# Altium PCB PCB1.PcbDoc
Units mm, origin at the board's own origin, x right, y up, seen from the top; angles counter-clockwise.
Board outline 115.7 x 56.26 mm, 2 copper layers (Top Layer, Bottom Layer); 82 components, 59 nets, 220 pads, 73 vias.
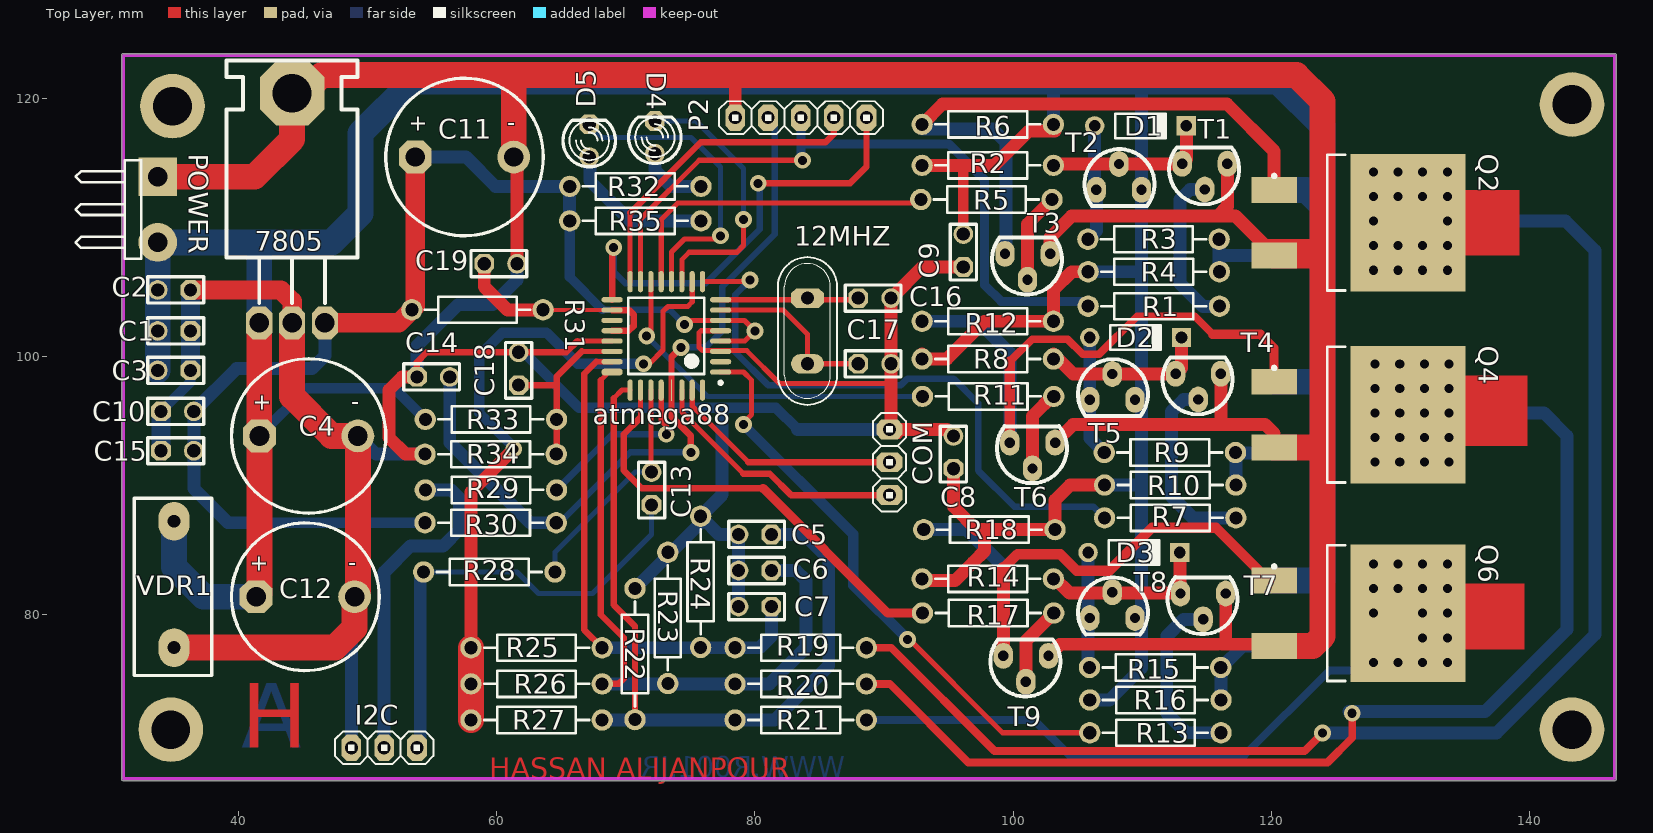
[diagram p0: Top Layer view]
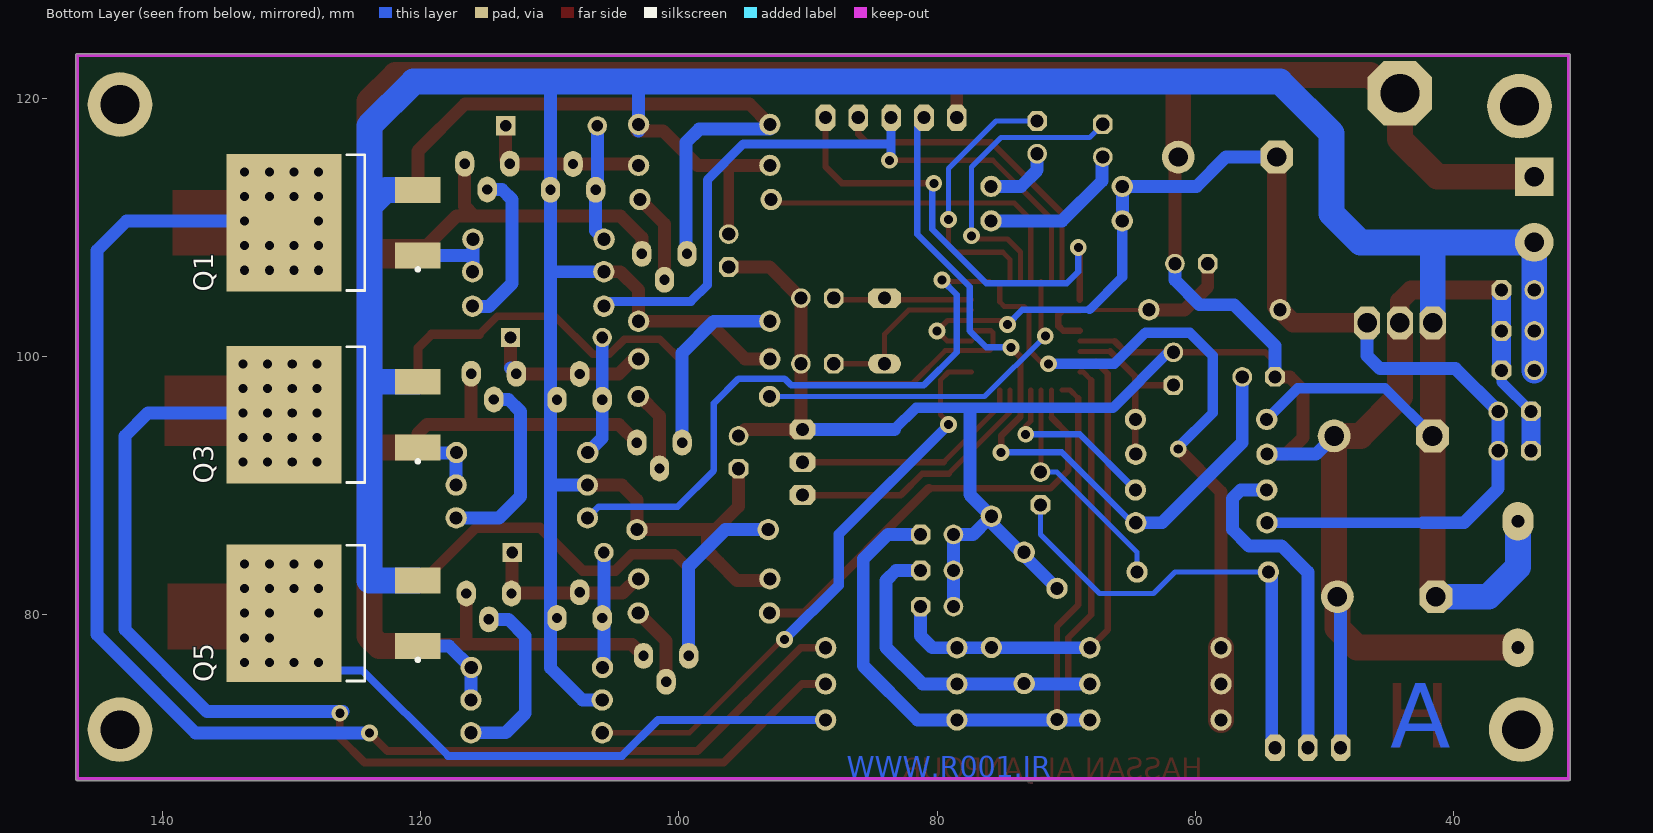
[diagram p1: Bottom Layer view, seen from below]

## Layer stack, top to bottom
Top Layer: signal copper 0.0356
Dielectric: dielectric 0.32, FR-4, Dk 4.8
Bottom Layer: signal copper 0.0356

## Board outline
31.115,67.183 cw(c31.115,67.31) 30.988,67.31 30.988,123.317 cw(c31.115,123.317) 31.115,123.444 146.558,123.444 cw(c146.558,123.317) 146.685,123.317 146.685,67.31 cw(c146.558,67.31) 146.558,67.183

## Design rules (kind name [scope] priority, off if disabled: settings)
Clearance [All] p1: gap=0.254
PolygonConnect [All] p1: connectstyle=Relief reliefconductorwidth=0.254 reliefentries=4 polygonreliefangle="90 Angle" airgapwidth=0.254
RoutingVias [All] p1: holewidth=0.711 width=1.27 viastyle="Through Hole" minholewidth=0.711 minwidth=1.27 maxholewidth=0.711 maxwidth=1.27
SilkscreenOverComponentPads [All] p1: minsilkscreentomaskgap=0.254
SolderMaskExpansion [All] p1: expansion=0.102
Width [All] p1: maxlimit=2 minlimit=0.3 preferedwidth=1
27 further rules are at their usual default settings.

## Components (designator, comment, footprint, x,y, rotation, side; value= is the part's Value field where it differs from the comment)
12MHZ "CRYSTAL" My_Crystal 84.074,101.981 r270 top (schematic designator Y?)
7805 "7805" My_TO-220 41.656,102.616 r0 top (schematic designator U2)
atmega88 "ATmega88A-AU" 32A_N 73.152,101.6 r180 top (schematic designator U1)
C1 "Cap" My_cap100n 35.052,101.981 r180 top
C2 "Cap" My_cap100n 35.052,105.156 r180 top
C3 "Cap" My_cap100n 35.052,98.933 r180 top
C4 "Cap" My_cap3300u#1 49.276,93.853 r0 top
C5 "Cap" My_cap100n 80.01,86.233 r180 top
C6 "Cap" My_cap100n 80.01,83.439 r180 top
C7 "Cap" My_cap100n 80.01,80.645 r180 top
C8 "Cap" My_cap100n 95.377,92.583 r90 top
C9 "Cap" My_cap100n 96.139,108.204 r90 top
C10 "Cap" My_cap100n 35.306,95.758 r0 top
C11 "Cap" My_cap3300u#2 61.341,115.443 r0 top
C12 "Cap" My_cap3300u#1 49.022,81.407 r0 top
C13 "Cap" My_cap100n 72.009,89.789 r90 top
C14 "Cap" My_cap100n 55.118,98.425 r0 top
C15 "Cap" My_cap100n 35.306,92.71 r0 top
C16 "Cap" My_cap100n 89.281,104.521 r0 top
C17 "Cap" My_cap100n 89.281,99.441 r0 top
C18 "Cap" My_cap100n 61.722,99.06 r90 top
C19 "Cap" My_cap100n 60.325,107.188 r0 top
COM "Header 3" My_1X03 90.424,91.821 r90 top (schematic designator P3)
D1 "1N4148" DO-35 109.855,117.856 r0 top
D2 "1N4148" DO-35 109.474,101.473 r0 top
D3 "1N4148" DO-35 109.347,84.836 r0 top
D4 "LED" My_LED3MM 72.263,116.967 r90 top
D5 "LED" My_LED3MM 67.183,116.713 r90 top
I2C "Header 3" My_1X03 51.308,69.723 r180 top (schematic designator P1)
P2 "Header 5" My_1X05 83.566,118.491 r180 top
POWER "Comment" HDR1X3H 33.782,113.919 r270 top
Q1 "IRF4905S" D2PAK_N 127,110.363 r0 bottom
Q2 "IRFZ44NS" D2PAK_N 127,110.363 r0 top
Q3 "IRF4905S" D2PAK_N 127,95.504 r0 bottom
Q4 "IRFZ44NS" D2PAK_N 127,95.504 r0 top
Q5 "IRF4905S" D2PAK_N 127,80.137 r0 bottom
Q6 "IRFZ44NS" D2PAK_N 127,80.137 r0 top
R1 "1k" My_axial-0.4 110.871,103.886 r180 top
R2 "1k" My_axial-0.4 98.044,114.808 r0 top
R3 "1k" My_axial-0.4 110.871,109.093 r0 top
R4 "1k" My_axial-0.4 110.871,106.553 r180 top
R5 "1k" My_axial-0.4 97.917,112.141 r180 top
R6 "1k" My_axial-0.4 98.044,117.983 r0 top
R7 "1k" My_axial-0.4 112.141,87.503 r180 top
R8 "1k" My_axial-0.4 98.044,99.822 r0 top
R9 "1k" My_axial-0.4 112.141,92.583 r0 top
R10 "1k" My_axial-0.4 112.141,90.043 r180 top
R11 "1k" My_axial-0.4 98.044,96.901 r180 top
R12 "1k" My_axial-0.4 98.044,102.743 r0 top
R13 "1k" My_axial-0.4 110.998,70.866 r180 top
R14 "1k" My_axial-0.4 98.044,82.804 r0 top
R15 "1k" My_axial-0.4 110.998,75.946 r0 top
R16 "1k" My_axial-0.4 110.998,73.406 r180 top
R17 "1k" My_axial-0.4 98.044,80.137 r180 top
R18 "1k" My_axial-0.4 98.171,86.614 r0 top
R19 "1k" My_axial-0.4 83.566,77.47 r0 top
R20 "1k" My_axial-0.4 83.566,74.676 r0 top
R21 "1k" My_axial-0.4 83.566,71.882 r0 top
R22 "1k" My_axial-0.4 70.739,76.962 r270 top
R23 "1k" My_axial-0.4 73.279,79.756 r270 top
R24 "1k" My_axial-0.4 75.819,82.55 r270 top
R25 "1k" My_axial-0.4 63.119,77.47 r0 top
R26 "1k" My_axial-0.4 63.119,74.676 r0 top
R27 "1k" My_axial-0.4 63.119,71.882 r0 top
R28 "1k" My_axial-0.4 59.436,83.312 r180 top
R29 "1k" My_axial-0.4 59.563,89.662 r180 top
R30 "1k" My_axial-0.4 59.538,87.122 r180 top
R31 "1k" My_axial-0.4 58.547,103.632 r0 top
R32 "1k" My_axial-0.4 70.739,113.157 r180 top
R33 "1k" My_axial-0.4 59.563,95.123 r180 top
R34 "1k" My_axial-0.4 59.563,92.456 r0 top
R35 "1k" My_axial-0.4 70.739,110.49 r180 top
T1 "2N2222" T4-TO92 116.078,114.681 r270 top
T2 "2N2222" T4-TO92 106.934,113.157 r90 top
T3 "2N2222" T4-TO92 102.362,107.696 r270 top
T4 "2N2222" T4-TO92 115.57,98.425 r270 top
T5 "2N2222" T4-TO92 106.426,96.901 r90 top
T6 "2N2222" T4-TO92 102.743,93.091 r270 top
T7 "2N2222" T4-TO92 115.951,81.407 r270 top
T8 "2N2222" T4-TO92 106.426,80.01 r90 top
T9 "2N2222" T4-TO92 102.235,76.581 r270 top
VDR1 "VDR75V" "0.47uf 400v" 37.973,74.676 r90 top

## Footprints (in the part's own frame and the unit in brackets; to place one, negate y for a bottom-side part, rotate by r counter-clockwise, add the part's x,y. Pads: shape width x height; smd on the part's side, far side on the other; paste and mask are expansions set on the pad)
"0.47uf 400v" [mm] "17*6mm"
  oval 3x2.4 hole 1: 1(2.794,2.921) 2(12.573,2.921)
  silkscreen extent 0.63,0 14.35,6
32A_N [mm] "Thin QFP, 32-Leads, Body 7x7mm, Pitch 0.8mm, IPC Medium Density"
  oval 1.65x0.4 smd: 1(-4.2,2.8) 2(-4.2,2) 3(-4.2,1.2) 4(-4.2,0.4) 5(-4.2,-0.4) 6(-4.2,-1.2) 7(-4.2,-2) 8(-4.2,-2.8) 17(4.2,-2.8) 18(4.2,-2) 19(4.2,-1.2) 20(4.2,-0.4) 21(4.2,0.4) 22(4.2,1.2) 23(4.2,2)
  oval 0.4x1.65 smd: 9(-2.8,-4.2) 10(-2,-4.2) 11(-1.2,-4.2) 12(-0.4,-4.2) 13(0.4,-4.2) 14(1.2,-4.2) 15(2,-4.2) 16(2.8,-4.2) 25(2.8,4.2) 26(2,4.2) 27(1.2,4.2) 28(0.4,4.2) 30(-1.2,4.2) 31(-2,4.2) 32(-2.8,4.2)
  oval 1.65x0.55 smd: 24(4.2,2.8)
  oval 0.04x1.65 smd: 29(-0.4,4.2)
  silkscreen extent -4.33,-2.95 2.95,3.75, body extent -3.5,-3.5 3.5,3.5, height 1.2
D2PAK_N [mm] "D2-PAK, 4-Leads, Body 8.8x10.4mm, Pitch 2.54mm, Lead Span 15.1mm, IPC Medium Density"
  rect 3.5x2 smd: 1(-6.8,2.54) 3(-6.8,-2.54)
  rect 8.9x10.65 smd: 2(3.55,0)
  silkscreen extent -6.92,-5.25 -1.3,5.25, body extent -2.7,-5.28 6.3,5.28, height 4.69
DO-35 [mm] "Diode, Axial; Body 3.8 x 1.9 mm (LxDia. max), Lead Dia. 0.53 mm (max)"
  round 1.5 hole 0.9: 1(-3.55,0)
  rect 1.5x1.5 hole 0.9: 2(3.55,0)
  silkscreen extent -1.95,-0.95 2.05,0.95
HDR1X3H [mm] "Connector; Header; 3 Position; Right Angle"
  rect 3x3 hole 1.5: 1(0,0)
  round 3 hole 1.5: 3(5.08,0)
  silkscreen extent -1.27,-6.35 6.35,-1.27
My_1X03 [mil]
  oct 60x80 hole 40: 1(-100,0) 2(0,0) 3(100,0)
  silkscreen extent -150,-50 150,50
My_1X05 [mil]
  oct 60x80 hole 40: 1(-200,0) 2(-100,0) 3(0,0) 4(100,0) 5(200,0)
  silkscreen extent -250,-50 250,50
My_axial-0.4 [mil]
  round 65 hole 40: 1(-200.5,-0.5) 2(199.5,-0.5)
  silkscreen extent -160,-41 160,40
My_cap100n [mil]
  oct 60x60 hole 40: 1(-50,0)
  round 60 hole 40: 2(50,0)
  silkscreen extent -90,-40 80,40
My_cap3300u#1 [mil]
  oct 100x100 hole 60: +(-300,0)
  round 100 hole 60: -(0,0)
  silkscreen extent -385,-235 85,235
My_cap3300u#2 [mil]
  oct 100x100 hole 59.06: +(-300,0)
  round 100 hole 59.06: -(0,0)
  silkscreen extent -390,-240 90,240
My_Crystal [mil]
  oct 60x100 hole 40: 1(-100,0)
  oval 60x100 hole 40: 2(100,0)
  silkscreen extent -225,-90 225,90
My_LED3MM [mil]
  round 60 hole 40: A(-50,0)
  oct 60x60 hole 40: K(50,0)
  silkscreen extent -80,-80 62,80
My_TO-220 [mil]
  oct 196.85x196.85 hole 118.11: 0(99.49,699.49)
  oct 80x100 hole 59.06: 1(-0.5,-0.5) 2(99.5,-0.5) 3(199.5,-0.5)
  silkscreen extent -100,60 300,800
T4-TO92 [mm]
  oval 2x1.5 hole 0.8: B(1.75,-1.25) C(-0.25,-3) E(-0.25,0.5)
  silkscreen extent -1.52,-4 2.89,1.41

## Part data
12MHZ: "Crystal"
7805: "Regulator"
atmega88: "8-bit AVR Microcontroller, 8KB Flash, 512 Bytes EEPROM, 1KB SRAM, 32-pin TQFP, Industrial Grade (-40°C to 85°C)"
C1 C2 C3 C5 C6 C7 C8 C9 C10 C13 C14 C15 C16 C17 C18 C19: library part "Cap ceramic", "CAP-100Nf"
C4 C11 C12: library part "Cap Pol", "CAP-3300Uf"
COM I2C: "Header, 3-Pin"
D1 D2 D3: library part "Diode 1N4148", "High Conductance Fast Diode"
D4 D5: "Typical INFRARED GaAs LED"
P2: "Header, 5-Pin"
Q1 Q2 Q3 Q4 Q5 Q6: "HEXFET Power MOSFET"
R1 R2 R3 R4 R5 R6 R7 R8 R9 R10 R11 R12 R13 R14 R15 R16 R17 R18 R19 R20 R21 R22 R23 R24 R25 R26 R27 R28 R29 R30 R31 R32 R33 R34 R35: library part Res, "resistor 1/4 wat"
T1 T2 T3 T4 T5 T6 T7 T8 T9: "NPN"
VDR1: library part "0.47uf 400v", "Capacitor 17*6mm"

## Free pads (board coordinates)
  round 5 hole 3: 0(34.798,71.12) 0(34.925,119.38) 0(143.256,71.12) 0(143.256,119.507)

## Via types
v1: diameter 1.3, hole 0.7, Top Layer to Bottom Layer, 73 vias

## Nets (pads, with @x,y where several pads share a name; then routed paths per layer and width w, separated by ;. In a path a pad name is that pad's centre, name@x,y a point inside that pad or via, vN(x,y) a via of type N, cw(c..) or ccw(c..) an arc to the next point about the centre after c; other vN are vias at no path point)
+12V: 7805.1 C1.2 C2.2 C3.2 C4.+ C8.1 C9.2 C12.+ POWER.3 Q1.3 Q3.3 Q5.3 R2.1 R4.2 R6.2 R8.1 R10.2 R12.2 R14.1 R16.2 R18.2 R33.2 T2.C T5.C T8.C VDR1.2 | length 329.3
  Top Layer w0.8: C9.2 96.139,114.668
  Top Layer w1: R8.1@92.951,100.19 93.32,99.822 94.869,99.822 97.777,102.73 R12.2 103.111,105.143 104.534,106.566 R4.2 ; R2.1 98.539,114.795 101.219,117.475 R6.2@103.251,117.475 ; R14.1@93.078,82.664 95.504,82.664 96.888,84.061 97.79,84.963 97.79,86.474 ; C8.1 95.377,88.392 97.168,86.601 R18.2 103.238,88.887 104.407,90.056 R10.2
  Top Layer w2: C4.+@41.643,94.729 7805.1 ; C12.+@41.656,81.661 C4.+
  Bottom Layer w0.8: C4.+ 45.339,97.536 52.095,97.536 R33.2
  Bottom Layer w1: R6.2@103.111,117.462 103.111,121.018 ; R4.2 109.82,106.566 ; R16.2 107.455,73.419 109.934,75.898 109.934,90.274 ; R10.2 109.715,90.056 109.934,90.274 ; 109.934,121.237 T2.C 109.934,90.274
  Bottom Layer w2: C3.2 C1.2 C2.2 POWER.3 47.244,108.839 49.466,111.061 49.466,117.284 53.467,121.285 120.523,121.285 123.952,117.856 123.952,111.633 ; VDR1.2 35.052,83.693 37.338,81.407 C12.+ ; 7805.1 41.643,108.458 ; Q5.3 123.825,82.677 ; Q3.3 123.952,98.044 ; Q1.3 122.682,112.903 123.952,111.633 ; 123.952,82.677 123.952,98.044 ; 123.952,98.044 123.952,111.633
B_EMF_U: atmega88.23 C7.1 R19.1 R24.2 R25.2 | length 40.1
  Top Layer w0.4: 67.723,99.6 atmega88.23
  Top Layer w0.5: 67.723,99.6 66.802,98.679 66.802,78.842 R25.2
  Bottom Layer w1: R25.2 R19.1 80.378,77.457 81.28,78.359 C7.1
B_EMF_V: atmega88.24 C6.1 R20.1 R23.2 R26.2 | length 51.9
  Top Layer w0.4: 68.072,98.171 68.701,98.8 atmega88.24
  Top Layer w0.5: 68.072,98.171 68.072,80.01 69.85,78.232 69.85,75.057 69.456,74.663 R26.2
  Bottom Layer w1: R26.2 R20.1 81.14,74.663 83.947,77.47 83.947,82.677 83.185,83.439 C6.1
B_EMF_W: atmega88.25 C5.1 R21.1 R22.2 R27.2 | length 59.9
  Top Layer w0.4: 69.088,96.774 69.714,97.4 atmega88.25
  Top Layer w0.5: 69.088,96.774 69.088,80.772 70.726,79.134 R22.2
  Bottom Layer w1: R27.2 R21.1 81.521,71.869 85.725,76.073 85.725,84.328 83.82,86.233 C5.1
DP_A0: atmega88.32
GLED: atmega88.11 D4.K | length 21.3
  Top Layer w0.4: atmega88.11 74.352,107.499 74.93,108.077 75.851,108.077 77.692,108.077 78.613,108.077 79.121,108.585 v1(79.121,110.617)
  Bottom Layer w0.4: D4.K 75.438,118.237 79.121,114.554 v1(79.121,110.617)
GND: 7805.0 7805.2 atmega88.3 atmega88.5 atmega88.21 C1.1 C2.1 C3.1 C4.- C5.2 C6.2 C7.2 C8.2 C9.1 C10.1 C11.- C12.- C14.1 C15.1 C16.2 C17.2 C18.2 C19.2 COM.3 I2C.3 P2.5 POWER.1 Q2.3 Q4.3 Q6.3 R22.1 R23.1 R24.1 R34.1 T1.E T3.E T4.E T6.E T7.E T9.E VDR1.1 | length 457.6
  Top Layer w0.4: 66.275,101.2 atmega88.21 ; atmega88.5 75.838,102 75.692,101.854 75.692,100.711 75.946,100.457 79.375,100.457 81.915,97.917 90.551,97.917
  Top Layer w0.5: C14.1 53.848,99.568 54.61,100.33 C18.2 65.405,100.33 66.275,101.2 ; COM.3@90.551,94.488 90.678,94.361 COM.3@91.186,93.853
  Top Layer w1: C14.1 52.705,98.425 51.689,97.409 51.689,93.726 52.972,92.443 R34.1 ; C11.- 61.595,115.189 C19.2 ; P2.5 78.486,120.904 ; COM.3 90.678,94.361 94.869,94.361 C8.2 ; COM.3@90.551,94.488 90.551,97.917 C17.2 C16.2 92.964,106.934 C9.1 ; T9.E 103.632,77.728 115.828,77.728 ; T3.E 102.862,109.212 104.521,110.871 115.824,110.871 ; T6.E 104.644,94.742 119.507,94.742 120.2,94.049 Q4.3 ; 116.07,95.258 T4.E ; T7.E 116.451,77.97 116.209,77.728 Q6.3@120.069,77.728 ; T1.E 116.578,111.625 115.824,110.871 ; 123.952,108.585 119.507,108.585 117.221,110.871 115.824,110.871
  Top Layer w1.5: C2.1 43.307,105.156 44.183,104.28 7805.2
  Top Layer w2: POWER.1 41.275,113.919 44.183,116.827 7805.0 45.072,120.383 46.482,121.793 61.341,121.793 ; VDR1.1 47.498,77.47 49.022,78.994 C12.- ; 7805.2 44.183,96.914 47.244,93.853 C4.-@48.387,93.853 ; C12.-@49.276,81.661 C4.- ; C11.- 61.341,121.793 ; Q6.3 123.19,77.597 123.952,78.359 123.952,92.964 ; Q4.3 123.952,92.964 ; Q2.3 123.825,107.823 ; 61.341,121.793 121.92,121.793 123.952,119.761 123.952,92.964
  Bottom Layer w0.8: C10.1 36.322,98.044 C3.1 ; C18.2 62.103,100.33 66.386,96.047 81.626,96.047 83.312,94.361
  Bottom Layer w1: I2C.3 C12.-@48.768,81.153 ; C4.- 50.686,92.443 R34.1 ; C14.1 53.848,100.838 57.023,104.013 59.69,104.013 61.595,105.918 C19.2 ; R22.1 R24.1@76.06,87.389 ; 77.47,95.947 77.47,89.306 R24.1 R24.1@76.06,87.389 ; C7.2 C6.2 C5.2 77.216,86.233 R24.1@76.06,87.389 ; 83.312,94.361 COM.3
  Bottom Layer w1.5: C15.1 C10.1 ; C3.1 C1.1 C2.1
"GREEN LED": 
MISO: atmega88.16 P2.2 | length 24.9
  Top Layer w0.4: atmega88.16 70.352,111.119
  Top Layer w0.5: 70.352,111.119 75.819,116.586 85.471,116.586 86.106,117.221 P2.2
MOSI/UH: atmega88.15 P2.3 R1.2 | length 54.8
  Top Layer w0.4: atmega88.15 71.152,110.649 75.692,115.189 v1(83.693,115.189)
  Bottom Layer w0.7: v1@83.566,115.189 P2.3 ; 83.566,116.459 94.996,116.459 97.79,113.665 97.79,105.537 99.06,104.267 105.435,104.267 R1.2
NetC13_1: C13.1 I2C.1 R28.2 | length 36.3
  Bottom Layer w0.4: R28.2 61.582,83.325 63.246,81.661 67.437,81.661 72.009,86.233 C13.1
  Bottom Layer w1: I2C.1 54.102,69.977 54.102,83.058 R28.2
NetC17_1: 12MHZ.2 atmega88.7 C17.1 | length 13.7
  Top Layer w0.4: atmega88.7 82.201,103.6 84.074,101.727 12MHZ.2 C17.1
NetC19_1: atmega88.18 atmega88.20 C19.1 R31.2 | length 16.9
  Top Layer w0.3: R31.2@63.634,103.6 atmega88.18
  Top Layer w0.5: atmega88.20 70.25,102 70.612,102.362 70.612,103.251 70.263,103.6 atmega88.18
  Top Layer w1: C19.1 59.055,105.41 60.846,103.619 R31.2
NetD1_1: D1.1 R3.1 T2.E | length 9.2
  Bottom Layer w1: R3.1 106.434,109.736 T2.E ; T2.E@106.299,112.776 106.299,112.907 D1.1
NetD1_2: D1.2 R2.2 T1.C T2.B | length 12.9
  Top Layer w1: R2.2@103.223,114.907 T2.B 113.054,114.907 T1.C 113.405,115.258 D1.2
NetD2_1: D2.1 R9.1 T5.E | length 9.4
  Bottom Layer w1: T5.E@105.924,96.653 D2.1 ; T5.E 105.926,93.693 R9.1
NetD2_2: D2.2 R8.2 T4.C T5.B | length 13.7
  Top Layer w1: R8.2@103.111,100.19 104.651,98.651 T5.B 112.546,98.651 T4.C 113.024,99.129 D2.2
  Bottom Layer w1: T4.C T4.C@113.024,99.129
NetD3_1: D3.1 R15.1 T8.E | length 8.8
  Bottom Layer w1: R15.1@105.797,76.042 D3.1
NetD3_2: D3.2 R14.2 T7.C T8.B | length 13.3
  Top Layer w1: R14.2@103.188,82.867 104.344,81.711 112.897,81.711 D3.2
NetD4_A: D4.A R32.1 | length 5.1
  Bottom Layer w1: D4.A@72.263,115.443 72.263,114.427 73.52,113.17 R32.1
NetD5_A: D5.A R35.1 | length 11.8
  Bottom Layer w1: D5.A@67.056,115.443 67.251,115.248 67.251,113.597 70.345,110.503 R35.1
NETLABEL84: atmega88.2
NetP1_2: I2C.2 R29.2 | length 26.1
  Bottom Layer w1: I2C.2 51.308,83.312 53.34,85.344 55.88,85.344 57.15,86.614 57.15,89.027 56.502,89.675 R29.2
NetQ1_1: Q1.1 R3.2 R4.1 | length 6.7
  Bottom Layer w1: R4.1@115.938,106.591 R3.2 ; 115.951,107.823 Q1.1
NetQ2_1: 
NetQ3_1: Q3.1 R9.2 R10.1 | length 5
  Bottom Layer w1: R10.1 117.234,92.545 Q3.1@119.781,92.545
NetQ4_1: 
NetQ5_1: Q5.1 R15.2 R16.1 | length 7.3
  Bottom Layer w1: R16.1 116.091,75.908 117.78,77.597 Q5.1
NetQ6_1: 
NetR1_1: R1.1 T1.B | length 12.6
  Bottom Layer w1: T1.B 113.693,112.931 112.903,112.141 112.903,105.664 114.681,103.886 115.824,103.886 R1.1@115.964,103.746
NetR5_1: R5.1 T3.B | length 7
  Top Layer w1: T3.B 101.112,110.256 R5.1
NetR6_1: Q2.1 R6.1 T3.C | length 48
  Top Layer w1: R6.1 94.531,119.55 116.543,119.55 120.2,115.893 Q2.1
  Bottom Layer w1: R6.1@92.951,117.602 98.425,117.602 99.441,116.586 T3.C@99.441,107.946
NetR7_1: R7.1 T4.B | length 14.7
  Bottom Layer w1: T4.B 113.185,96.675 112.268,95.758 112.268,89.154 113.906,87.516 R7.1
NetR11_1: R11.1 T6.B | length 6.4
  Top Layer w1: T6.B 101.493,95.397 R11.1@103.137,97.041
NetR12_1: Q4.1 R12.1 T6.C | length 47.5
  Top Layer w0.6: 99.743,99.616 101.473,101.346 104.207,101.346 105.384,100.169 106.646,100.169 109.601,103.124 114.046,103.124 115.443,101.727
  Top Layer w0.7: 115.443,101.727 119.126,101.727 120.2,100.653 Q4.1
  Top Layer w0.8: T6.C 99.743,99.616
  Bottom Layer w1: R12.1 97.295,102.73 99.743,100.282 T6.C
NetR13_1: R13.1 T7.B | length 14.2
  Bottom Layer w1: T7.B 113.185,79.657 111.887,78.359 111.887,72.39 113.398,70.879 R13.1
NetR17_1: R17.1 T9.B | length 6.2
  Top Layer w1: T9.B 100.985,77.998 R17.1
NetR18_1: Q6.1 R18.1 T9.C | length 46.1
  Top Layer w0.8: 99.235,83.614 100.33,84.709 103.632,84.709 104.909,83.432 107.435,83.432 110.744,86.741 115.697,86.741 119.761,82.677 Q6.1
  Top Layer w1: T9.C 99.235,83.614
  Bottom Layer w1: R18.1 96.406,86.601 99.235,83.772 T9.C
NetR32_2: 
NetU1_8: 12MHZ.1 atmega88.8 C16.1 | length 10.5
  Top Layer w0.4: atmega88.8 C16.1@87.89,104.4
"RED LED": 
RESET: atmega88.29 C14.2 P2.4 R30.1 | length 59.7
  Top Layer w0.5: v1(74.295,100.711) 73.552,99.968 atmega88.29 73.552,95.358 75.057,93.853 v1(75.057,92.583)
  Bottom Layer w0.5: R30.1 64.91,87.135 70.358,92.583 v1(75.057,92.583) ; v1(74.295,100.711) 76.2,100.711 77.47,101.981 77.47,105.41 81.534,109.474 81.534,117.983 P2.4
  Bottom Layer w1: C14.2 56.388,93.345 62.598,87.135 R30.1
RLED: atmega88.12 D5.K | length 23.6
  Top Layer w0.4: atmega88.12 73.552,108.096 74.549,109.093 76.835,109.093 v1@77.343,109.601
  Bottom Layer w0.4: D5.K 68.199,116.967 75.057,116.967 77.343,114.681 v1(77.343,109.347)
RXD_LK_A2: atmega88.30 COM.1 | length 20.4
  Top Layer w0.4: atmega88.30 74.352,95.701 79.121,90.932
  Top Layer w0.5: 79.121,90.932 81.153,90.932 82.804,89.281 COM.1
SCK: atmega88.17 P2.1 | length 35.6
  Top Layer w0.5: atmega88.17 v1@68.952,108.449 ; v1(80.264,113.411) 87.376,113.411 88.646,114.681 P2.1
  Bottom Layer w0.5: v1(69.079,108.449) 69.079,106.562 69.977,105.664 76.2,105.664 80.391,109.855 v1@80.391,113.411
SCL: atmega88.28 R29.1 | length 13.2
  Top Layer w0.4: atmega88.28 72.752,95.015 v1@73.152,94.615
  Bottom Layer w0.5: R29.1 68.961,93.98 v1(73.152,93.98)
SDA: atmega88.27 C13.2 R28.1 | length 17.9
  Top Layer w0.4: C13.2@71.952,91.116 atmega88.27
  Bottom Layer w0.4: R28.1 64.529,84.849 70.739,91.059 C13.2
SUMME_UVW: atmega88.10 R25.1 R26.1 R27.1 | length 53.8
  Top Layer w0.4: v1(71.374,99.441) 71.843,99.441 72.898,100.496 72.898,103.505 73.279,103.886 74.803,103.886 75.152,104.235 atmega88.10@75.152,105.537
  Top Layer w1: R25.1 58.026,89.522 v1(61.341,92.837)
  Top Layer w2: R27.1 R26.1 R25.1
  Bottom Layer w0.8: v1@61.341,92.964 58.674,95.631 58.674,100.076 60.452,101.854 63.881,101.854 66.294,99.441 v1(71.374,99.441)
TXD_DM_A1: atmega88.31 COM.2 | length 18.3
  Top Layer w0.4: atmega88.31 75.152,96.171 79.502,91.821
  Top Layer w0.5: 79.502,91.821 COM.2
U: Q1.2 Q2.2 R19.2 | length 105.5
  Top Layer w0.6: R19.2 90.564,77.457 98.552,69.469 122.555,69.469 v1(123.952,70.866)
  Bottom Layer w1: v1(123.952,70.866) 137.414,70.866 145.034,78.486 145.034,108.204 142.748,110.49 v1(133.604,110.49)
  other v1: 127.889,106.68 129.794,106.68 131.699,106.68 133.604,106.68 127.889,108.585 129.794,108.585 131.699,108.585 133.604,108.585 127.889,110.49 127.889,112.395 129.794,112.395 131.699,112.395 133.604,112.395 127.889,114.3 129.794,114.3 131.699,114.3 133.604,114.3
UL: atmega88.13 R5.2 | length 25.5
  Top Layer w0.4: atmega88.13 72.752,110.598 74.041,111.887 92.583,111.887 R5.2
V: Q3.2 Q4.2 R20.2 | length 87.2
  Top Layer w0.6: R20.2 90.437,74.663 96.52,68.58 124.333,68.58 126.238,70.485 v1(126.238,72.39)
  Bottom Layer w1: v1@125.984,72.517 136.525,72.517 142.875,78.867 142.875,93.853 141.097,95.631 v1(133.731,95.631)
  other v1: 128.016,91.821 129.921,91.821 131.826,91.821 133.731,91.821 128.016,93.726 129.921,93.726 131.826,93.726 133.731,93.726 128.016,95.631 129.921,95.631 131.826,95.631 128.016,97.536 129.921,97.536 131.826,97.536 133.731,97.536 128.016,99.441 129.921,99.441 131.826,99.441 133.731,99.441
V_BAT: atmega88.22 C18.1 R33.1 R34.2 | length 14
  Top Layer w0.4: 66.618,100.4 atmega88.22
  Top Layer w0.5: C18.1 64.643,97.79 64.656,97.803 ; R34.2@64.656,92.469 R33.1 64.656,97.803 ; 66.618,100.4 64.656,98.438 64.656,97.803
VCC: 7805.3 atmega88.4 atmega88.6 C10.2 C11.+ C15.2 R30.2 R31.1 R32.2 R35.2 | length 97.4
  Top Layer w0.4: v1(74.549,102.489) 74.86,102.8 atmega88.6 79.191,102.8 v1(80.01,101.981) 79.229,101.2 atmega88.4
  Top Layer w1.5: 7805.3 52.438,102.603 R31.1 ; R31.1@53.721,103.886 C11.+
  Bottom Layer w0.5: 68.199,103.632 73.406,103.632 v1(74.549,102.489)
  Bottom Layer w0.7: 65.672,106.159 68.199,103.632
  Bottom Layer w0.8: 42.405,87.135 R30.2 ; 65.672,106.159 R35.2
  Bottom Layer w1: 42.405,87.135 39.23,87.135 36.576,89.789 C15.2 C10.2 39.878,99.06 45.72,99.06 46.723,100.063 7805.3 ; C11.+ 57.658,115.443 59.931,113.17 R32.2 R35.2
VH: atmega88.9 R7.2 | length 47
  Top Layer w0.4: atmega88.9 v1@79.511,105.8
  Bottom Layer w0.5: v1(79.629,105.918) 78.486,104.775 78.486,100.33 81.026,97.79 91.313,97.79 91.821,98.298 95.377,98.298 97.282,96.393 97.282,91.186 100.076,88.392 106.197,88.392 R7.2
VL: atmega88.14 R11.2 | length 27.2
  Top Layer w0.4: v1@71.952,101.924 atmega88.14
  Bottom Layer w0.4: v1(71.628,101.6) 76.327,96.901 92.202,96.901 92.215,96.914 R11.2
W: Q5.2 Q6.2 R21.2 | length 43.4
  Bottom Layer w0.6: R21.2 101.613,71.869 104.394,69.088 117.856,69.088 124.46,75.692 127.254,75.692 v1(127.889,76.327)
  other v1: 129.794,76.327 131.699,76.327 133.604,76.327 131.699,78.232 133.604,78.232 127.889,80.137 131.699,80.137 133.604,80.137 127.889,82.042 129.794,82.042 131.699,82.042 133.604,82.042 127.889,83.947 129.794,83.947 131.699,83.947 133.604,83.947
WH: atmega88.1 R13.2 | length 45.6
  Top Layer w0.4: atmega88.1 79.127,98.8 79.756,98.171 79.756,95.504 v1@78.994,94.742 ; v1@91.694,78.359 99.174,70.879 R13.2
  Bottom Layer w0.8: v1(79.121,94.742) 87.63,86.233 87.63,82.296 v1(91.821,78.105)
WL: atmega88.26 R17.2 | length 34.5
  Top Layer w0.4: 71.152,95.282 atmega88.26
  Top Layer w0.5: 71.152,95.282 69.85,93.98 69.85,91.186 71.247,89.789 80.645,89.789
  Top Layer w0.7: 80.645,89.789 90.297,80.137 R17.2@92.977,80.137
pads on no net: atmega88.19

## Keep-outs
Keep-Out Layer:
  lines w0.254: 31.115,67.31 146.558,67.31 146.558,123.317 31.115,123.317 31.115,67.31

## Other copper
Top Layer:
  rectangle net V: 134.62,93.091 139.827,98.552
  rectangle net U: 134.493,107.823 139.192,112.903
  rectangle net W: 134.493,77.343 139.573,82.423
  text "H" at 40.259,69.723 h5
  text "HASSAN ALIJANPOUR" at 59.436,67.31 h1.6
Bottom Layer:
  text "A" at 40.259,69.723 h5
  text "WWW.R001.IR" at 86.995,67.437 h1.6

## Text inside footprints (layer, text, board x,y; h text height)
C4: Top Overlay "-" at 48.768,95.885 h1.27; Top Overlay "+" at 41.148,95.885 h1.27
C11: Top Overlay "-" at 60.833,117.475 h1.27; Top Overlay "+" at 53.213,117.475 h1.27
C12: Top Overlay "-" at 48.514,83.439 h1.27; Top Overlay "+" at 40.894,83.439 h1.27